# Altium PCB FU-AM-FU6861Q-B-002-HW-V3.0-20200620.PcbDoc (part 2 of 2)
Units mm, origin at the board's own origin, x right, y up, seen from the top; angles counter-clockwise.
Board outline 105.1 x 87.1 mm, 2 copper layers (TopLayer, BottomLayer); 151 components, 80 nets, 397 pads, 605 vias.
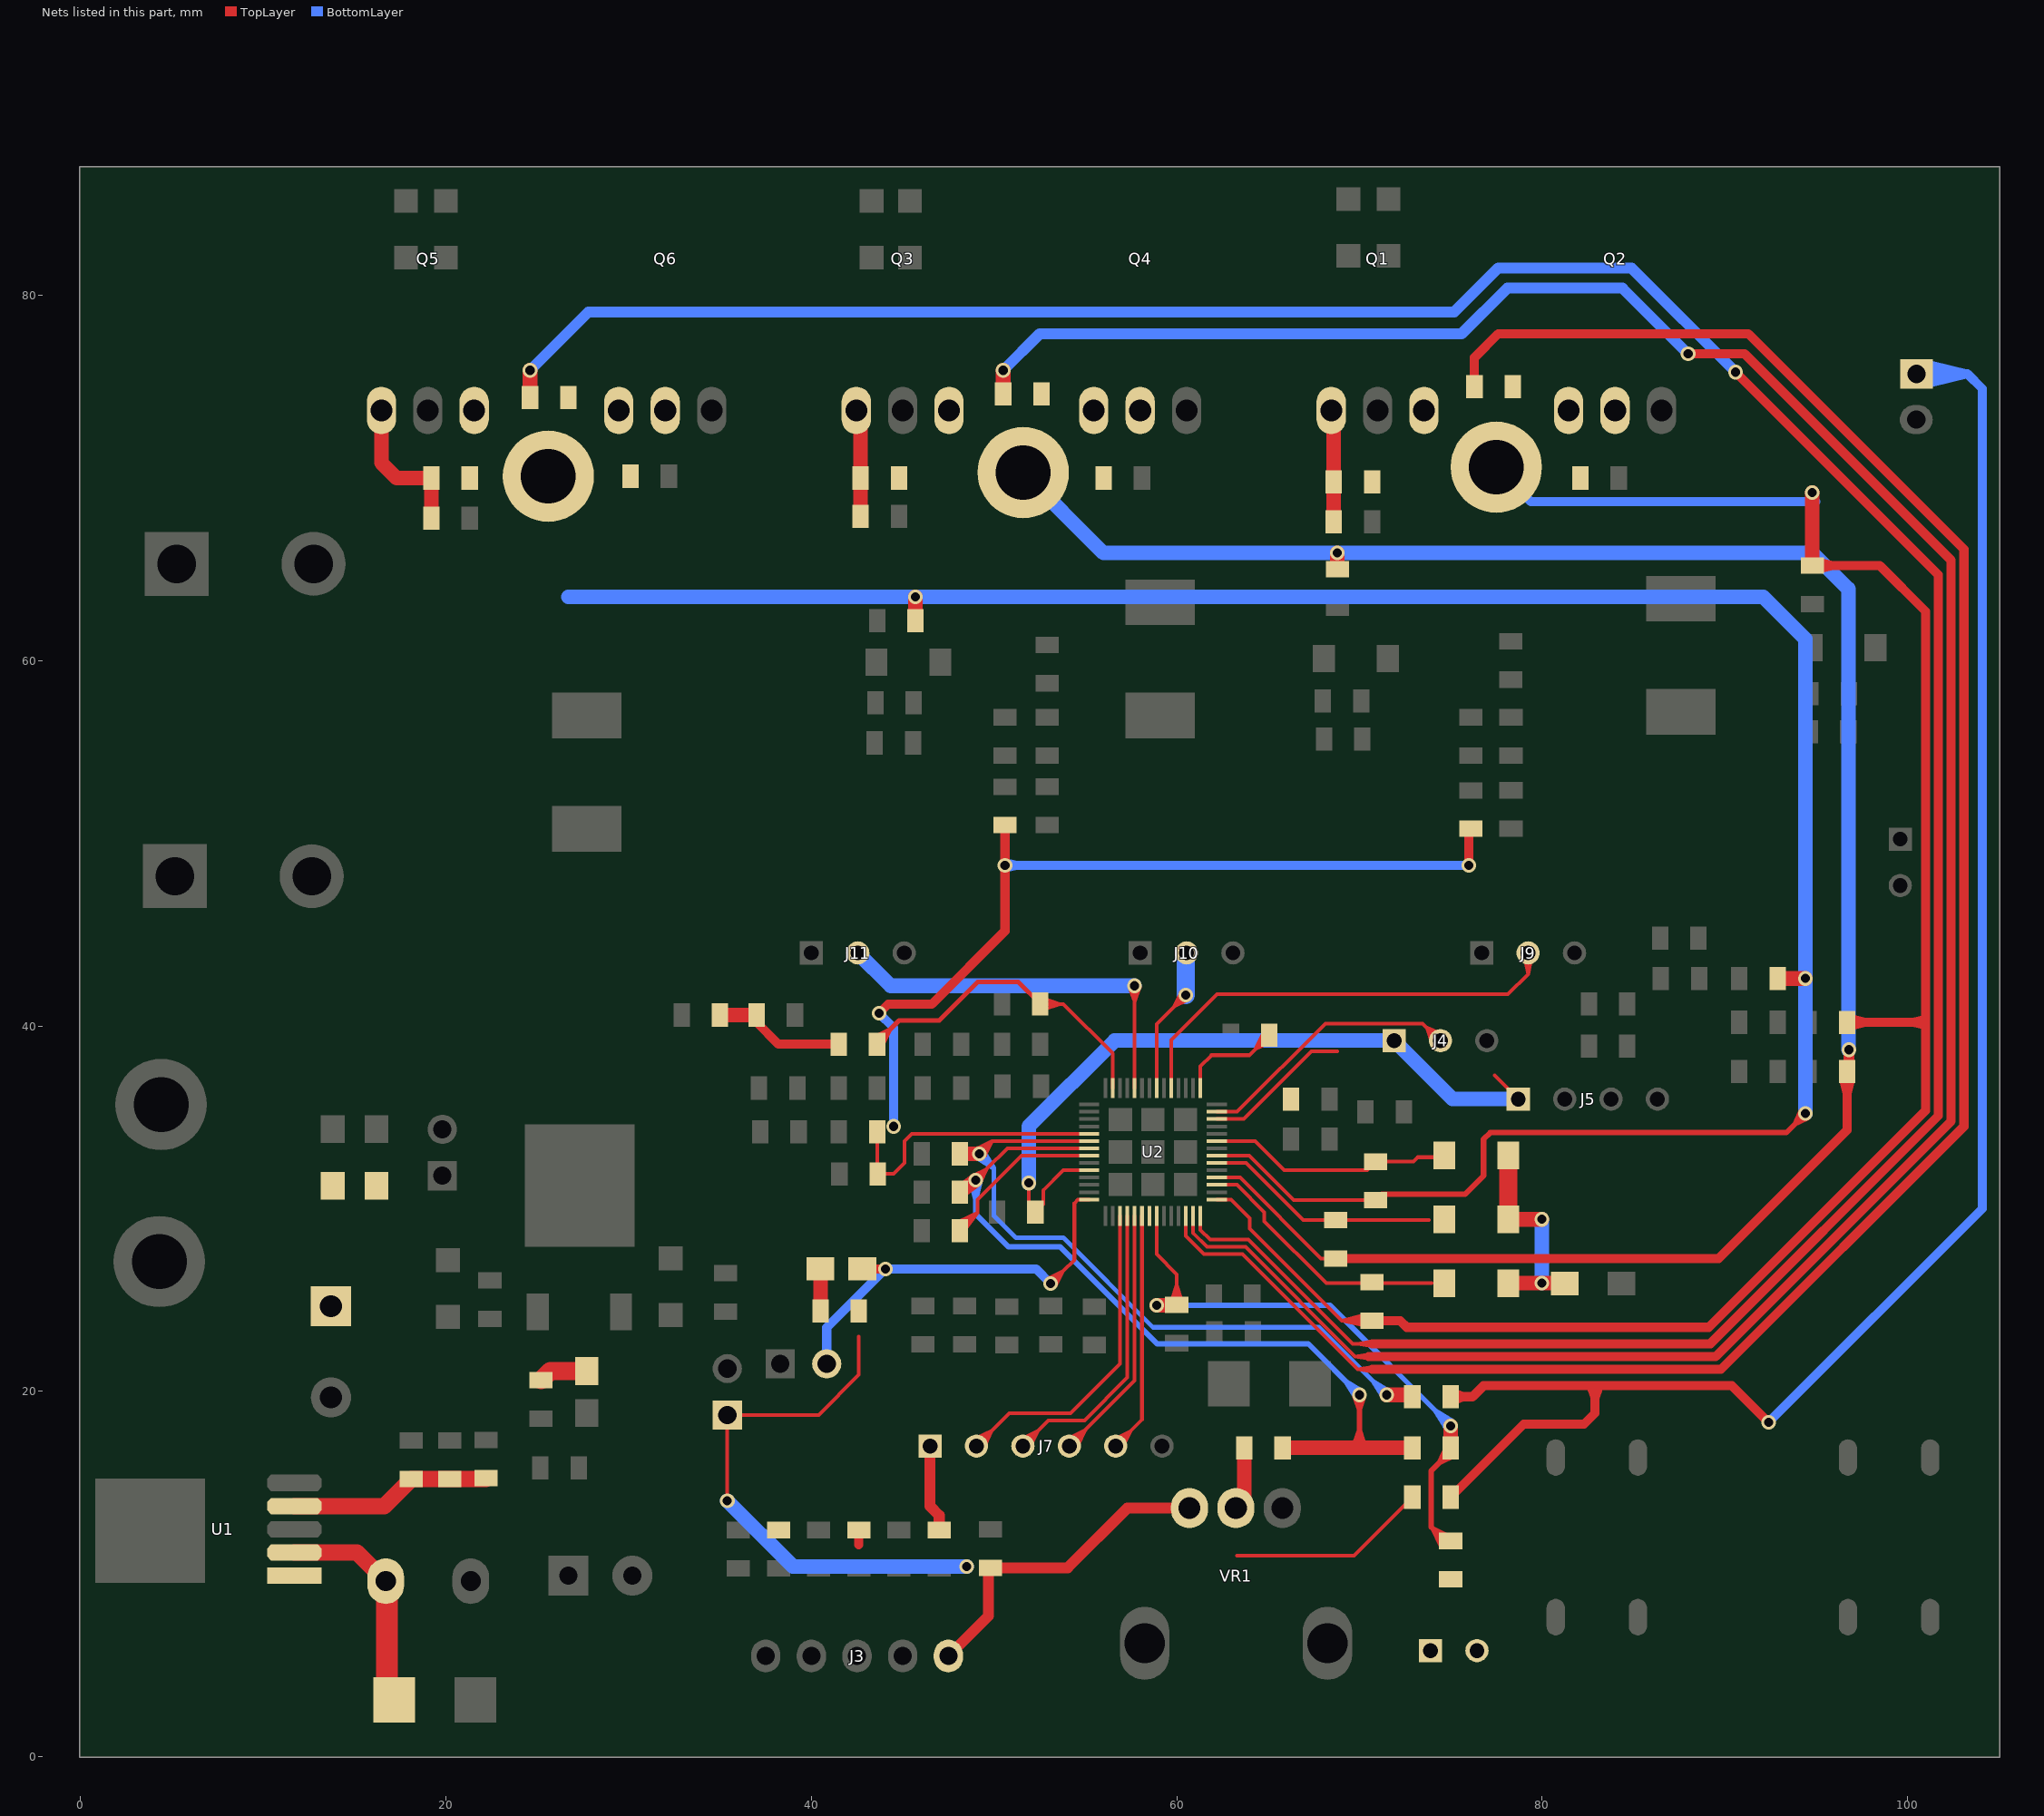
[diagram p2: the nets of this part, all layers, seen from the top]

## Via types
v1: diameter 0.8, hole 0.5, TopLayer to BottomLayer, tented both sides, 575 vias
v2: diameter 0.6, hole 0.3, TopLayer to BottomLayer, tented both sides, 30 vias

## Nets (pads, with @x,y where several pads share a name; then routed paths per layer and width w, separated by ;. In a path a pad name is that pad's centre, name@x,y a point inside that pad or via, vN(x,y) a via of type N, cw(c..) or ccw(c..) an arc to the next point about the centre after c; other vN are vias at no path point) (continued)
LOU: R25.1 U2.54 | length 119.2
  TopLayer w0.2: U2.54@60.5,29.6 60.5,28.5 61.5,27.5 63.6,27.5 69.9,21.2 ; 70.662,21.079 69.9,21.2 ; 70.687,21.333 69.9,21.2 ; 70.7,21.2 69.9,21.2
  TopLayer w0.5: 70.7,21.2 89.8,21.2 103.1,34.5 103.1,66.1 91.3,77.9 77.6,77.9 76.301,76.601 R25.1@76.301,74.999
LOV: R30.1 U2.55 | length 144.1
  TopLayer w0.2: U2.55@60.9,29.6 60.9,28.666 61.666,27.9 63.766,27.9 69.766,21.9 ; 70.5,21.9 69.766,21.9 ; 70.528,21.779 69.766,21.9 ; 70.553,22.033 69.766,21.9
  TopLayer w0.5: 70.5,21.9 89.51,21.9 102.4,34.79 102.4,65.5 91.1,76.8 v1(88,76.8)
  TopLayer w0.8: R30.1@50.501,74.599 v1@50.501,75.899
  BottomLayer w0.6: v1(50.5,75.9) 52.5,77.9 75.6,77.9 78.1,80.4 84.4,80.4 v1(88,76.8)
LOW: R31.1 U2.56 | length 168
  TopLayer w0.2: U2.56@61.3,29.6 61.3,28.831 61.831,28.3 63.931,28.3 69.631,22.6 70.7,22.6 ; 70.663,22.479 69.901,22.6 70.688,22.733
  TopLayer w0.5: 70.7,22.6 89.22,22.6 101.7,35.08 101.7,64.7 v1(90.6,75.8)
  TopLayer w0.8: R31.1@24.601,74.399 v1@24.601,75.899
  BottomLayer w0.6: v1(24.6,75.9) 27.8,79.1 75.2,79.1 77.6,81.5 84.9,81.5 v1(90.6,75.8)
MISO: J7.5 U2.48 | length 15
  TopLayer w0.2: J7.5@56.66,17 58.1,18.44 U2.48@58.1,29.6 ; J7.5@56.671,17.419 57.468,17.807 J7.5@57.079,17.011
MOSI: J7.3 U2.46 | length 17.9
  TopLayer w0.2: J7.3@51.58,17 52.98,18.4 54.954,18.4 57.3,20.746 U2.46@57.3,29.6 ; J7.3@51.607,17.434 52.403,17.823 ; J7.3@52.014,17.027 52.403,17.823
NetC4_1: C4.1 R1.2 R2.2 U1.1
NetC11_2: C11.2 R11.1 R12.2 U1.4 | length 11.1
  TopLayer w0.9: U1.4@11.7,13.71 16.611,13.71 R12.2@18.099,15.199 C11.2@22.165,15.199
NetC15_1: C15.1 U2.36 | length 13.6
  TopLayer w0.2: C15.1@47.903,29.111 48.7,29.5 ; C15.1@48.1,29.3 49.1,29.766 ; C15.1@48.134,28.734 48.151,28.795 C15.1@48.159,28.825 ; C15.1@48.134,28.8 C15.1@48.159,28.825 ; C15.1@48.183,28.912 C15.1@48.159,28.825 ; C15.1@48.3,28.7 49.1,29.766 ; C15.1@48.311,28.703 48.7,29.5 ; U2.36@55.2,32.9 51.5,32.9 49.1,30.5 49.1,29.766 ; C15.1@48.159,28.825 49.1,29.766
NetC43_2: C43.2 U2.15 | length 7.7
  TopLayer w0.2: U2.15@61.3,36.6 61.3,37.8 61.9,38.4 63.966,38.4 C43.2@65.066,39.5 ; C43.2@64.821,39.751 64.286,38.72 C43.2@65.082,39.109
NetD1_2: D1.2 L1.1 U1.2 | length 11.7
  TopLayer w0.9: U1.2@11.7,11.17 15.13,11.17 L1.1@16.7,9.6
  TopLayer w1.2: D1.2@16.764,3.455 L1.1@16.764,9.5
NetD6_A: D6.A D7.A D8.A R58.1 | length 11.9
  TopLayer w0.25: D8.A@78.16,33.013 D8.A@78.472,32.7
  TopLayer w0.8: D6.A@78.16,25.913 79.4,25.913 ; D7.A@78.672,29.413 v1(80,29.413) ; 79.587,25.913 79.4,25.913 ; R58.1@81.237,25.913 79.4,25.913
  TopLayer w1: D7.A@78.16,29.413 D8.A@78.16,32.813
  BottomLayer w0.8: v1(80,25.913) v1(80,29.413)
NetJ12_2: J12.2 LED1.2 U2.42 | length 24.8
  TopLayer w0.2: v1@52.971,26.179 53.767,26.567 54.4,27.2 54.4,30.303 54.597,30.5 U2.42@55.2,30.5 ; v1(53.1,25.9) 53.767,26.567 v1@53.378,25.771
  TopLayer w0.5: LED1.2@42.786,26.7 v1(44.056,26.7)
  BottomLayer w0.5: J12.2@40.84,21.5 40.84,23.484 v1(44.056,26.7) 52.3,26.7 v1(53.1,25.9)
NetLED1_1: LED1.1 R18.2 | length 2.3
  TopLayer w0.8: R18.2@40.498,24.401 R18.2@40.498,24.401 LED1.1@40.5,26.7
NetLED4_1: LED4.1 R10.2 | length 2.7
  TopLayer w1: R10.2@25.201,20.601 25.699,21.1 LED4.1@27.7,21.1
NetNTC1_1: NTC1.1 R9.2 R48.1 | length 102.9
  TopLayer w0.2: R48.1@75.361,19.412 76.199,19.7 76.197,19.701 R48.1@75.361,19.988 ; 82.612,20.039 82.9,19.201 83.188,20.039
  TopLayer w0.5: R48.1@74.998,19.701 76.197,19.701 76.201,19.701 76.8,20.3 82.9,20.3 ; R9.2@75.001,14.199 79.002,18.2 82.3,18.2 82.9,18.8 82.9,19.201 82.9,20.3 ; v1(92.4,18.3) 90.4,20.3 82.9,20.3
  BottomLayer w0.5: v1(92.4,18.3) 104.1,30 104.1,74.894 103.294,75.7 ; NTC1.1@100.5,75.7 103.294,75.7 ; NTC1.1@101.244,75.2 103.294,75.7 ; NTC1.1@101.244,76.2 103.294,75.7
NetQ1_1: Q1.1 R23.2 R24.2 | length 6
  TopLayer w0.8: R23.2@68.598,67.601 R24.2@68.598,69.801 Q1.1@68.598,73.562
NetQ2_1: Q2.1 R25.2 R26.2
NetQ3_1: Q3.1 R27.2 R29.2 | length 5.6
  TopLayer w0.8: R27.2@42.698,67.901 R29.2@42.698,70.001 Q3.1@42.698,73.462
NetQ4_1: Q4.1 R30.2 R32.2
NetQ5_1: Q5.1 R28.2 R49.2 | length 8.1
  TopLayer w0.8: Q5.1@16.46,73.7 16.46,70.84 17.299,70.001 R49.2@19.199,70.001 R28.2@19.199,67.801
NetQ6_1: Q6.1 R31.2 R50.2
NetR13_2: R13.2 R14.2 R15.1 | length 7.3
  TopLayer w0.2: R15.1@37.001,40.599 R15.1@37.202,40.399
  TopLayer w0.5: R15.1@37.001,40.199 38.199,39.001 R14.2@41.498,39.001
  TopLayer w0.8: R13.2@35.001,40.599 R15.1@37.001,40.599
NetR16_1: J13.1 J13.2 R16.1
NetR17_1: R17.1 VR1.W | length 3.3
  TopLayer w0.8: VR1.W@63.24,13.6 VR1.W@63.24,14.061 ; VR1.W@63.701,14.061 R17.1@63.701,16.899
NSS: J7.2 U2.45 | length 19.6
  TopLayer w0.2: J7.2@49.04,17 50.84,18.8 54.2,18.8 56.9,21.5 U2.45@56.9,29.6 ; J7.2@49.084,17.452 49.881,17.841 J7.2@49.492,17.044
ONOFF: U2.49
OVP: C13.1 R14.1 U2.27 | length 21.4
  TopLayer w0.2: R14.1@43.555,39.463 44.351,39.851 R14.1@43.962,39.055 ; C13.1@52.451,41.283 C13.1@52.534,41.2 53.8,41.2 56.5,38.5 U2.27@56.5,36.6 ; C13.1@52.762,40.912 53.6,41.2 C13.1@52.762,41.488
  TopLayer w0.25: R14.1@43.599,39.099 44.8,40.3 47,40.3 49.1,42.4 51.334,42.4 C13.1@52.534,41.2
P1.4: J9.2 U2.19 | length 28.4
  TopLayer w0.2: U2.19@59.7,36.6 59.7,39.231 62.204,41.735 78.135,41.735 79.24,42.84 ; J9.2@78.948,44.287 79.24,42.84 ; 79.24,43.34 J9.2@79.24,44 79.24,42.84 ; J9.2@79.532,44.287 79.24,42.84
P1.6: J10.2 U2.21 | length 9.8
  TopLayer w0.2: U2.21@58.9,36.6 58.9,40.1 59.85,41.05 ; v1@60.239,41.847 60.232,41.831 59.851,41.051 ; v1(60.5,41.7) 59.851,41.051 ; v1@60.647,41.439 60.631,41.431 59.85,41.05
  BottomLayer w1: v1(60.5,41.7) J10.2@60.5,43.96
P2.1: J11.2 U2.24 | length 23.5
  TopLayer w0.2: v1@57.412,42.139 57.423,42.105 57.7,41.301 ; U2.24@57.7,36.6 57.7,38.633 57.7,41.3 ; 57.7,41.5 57.7,41.301 ; v1(57.7,42.2) 57.7,41.301 ; v1@57.988,42.139 57.977,42.105 57.7,41.301
  BottomLayer w0.8: J11.2@42.54,44 44.34,42.2 v1(57.7,42.2)
PWMIN: C22.1 R16.2 R21.1 U2.50 | length 44.1
  TopLayer w0.2: U2.50@58.9,29.6 58.9,27.5 60,26.4 C22.1@60,24.734 ; C22.1@59.712,24.613 60,25.451 C22.1@60.288,24.612 ; C22.1@59.712,24.968 60,25.806 C22.1@60.288,24.968 ; R16.2@74.472,11.469 73.939,12.561 R16.2@74.736,12.172 ; R21.1@74.651,16.765 74.262,15.969 R21.1@75.058,16.358
  TopLayer w0.3: R16.2@74.699,11.801 73.939,12.561 73.939,15.646 R21.1@75,16.707
  TopLayer w0.8: v1(58.9,24.7) C22.1@59.966,24.7 ; R21.1@75,16.707 v1(75,18.1)
  BottomLayer w0.25: v1@59.005,24.445 60.096,24.7 v1@59.04,24.948 ; v1@74.689,18.061 74.117,18.983 v1@75.07,18.391
  BottomLayer w0.3: v1(58.9,24.7) 68.4,24.7 v1(75,18.1)
SCLK: J7.4 U2.47 | length 17.6
  TopLayer w0.2: J7.4@53.96,17.247 54.756,17.636 J7.4@54.367,16.839 ; J7.4@54.12,17 57.7,20.58 U2.47@57.7,29.6 ; J7.4@54.207,17.494 55.003,17.883 J7.4@54.614,17.087
SREF: C23.1 R17.2 R21.2 U2.35 | length 54.6
  TopLayer w0.2: v1@48.808,31.781 48.865,31.81 49.604,32.17 ; v1(48.989,31.555) 49.604,32.17 ; v1@49.215,31.374 49.243,31.431 49.604,32.17 ; 49.604,32.17 50.734,33.3 U2.35@55.2,33.3 ; 69.712,17.145 70,17.983 70.288,17.145 ; v1@69.712,19.711 69.715,19.702 70,18.873 70.285,19.702 v1@70.288,19.71
  TopLayer w0.3: 70,17.029 70,17.983 70,18.872 v1(70,19.8)
  TopLayer w0.8: C23.1@48.134,30.9 v1(48.989,31.555) ; R17.2@65.801,16.899 R21.2@72.897,16.899
  BottomLayer w0.25: v1@48.734,31.492 48.989,30.4 v1@49.237,31.456 ; v1@69.765,19.685 69.194,20.606 v1@70.146,20.015
  BottomLayer w0.3: v1(48.989,31.555) 48.989,30.4 48.989,29.7 50.789,27.9 53.628,27.9 58.928,22.6 67.2,22.6 v1(70,19.8)
TMOS: C44.1 R48.2 U2.34 | length 44
  TopLayer w0.2: v1@49.103,33.311 49.9,33.7 ; v1(49.2,33) 49.9,33.7 ; v1@49.511,32.903 49.9,33.7 ; U2.34@55.2,33.7 49.9,33.7
  TopLayer w0.8: C44.1@48.234,33 v1(49.2,33) ; v1(71.5,19.8) R48.2@72.799,19.8
  BottomLayer w0.25: v1@49.047,32.791 50,32.2 ; v1(49.2,33) 50,32.2 ; v1@49.428,33.122 50,32.2 ; v1@71.332,19.618 70.76,20.54 v1@71.713,19.948 ; v1(71.5,19.8) 67.8,23.5 58.7,23.5 53.8,28.4 51.2,28.4 50,29.6 50,32.2
U: C45.1 Q1.3 Q2.2 R24.1 R35.2 R46.2 U2.1 U5.1 | length 116.7
  TopLayer w0.2: U2.1@62.2,30.5 62.975,30.5 64,29.475 64,28.9 69.034,23.866 ; C45.1@70.18,24.155 69.034,23.866 ; C45.1@70.206,23.622 69.034,23.866 ; C45.1@70.206,23.745 69.444,23.866 C45.1@70.231,23.999 ; C45.1@70.7,23.866 69.034,23.866
  TopLayer w0.4: R35.2@95.3,65.001 96.1,65.201 R35.2@95.3,65.401 ; R46.2@97.092,39.999 97.892,40.199 R46.2@97.092,40.399 ; 100.927,39.999 100.127,40.199 100.927,40.399
  TopLayer w0.5: C45.1@70.7,23.866 72.234,23.866 72.6,23.5 89.13,23.5 101,35.37 101,62.7 98.499,65.201 R35.2@94.801,65.201 ; R46.2@96.701,40.199 100.7,40.199
  TopLayer w0.8: R35.2@94.801,65.201 v1(94.801,69.199)
  BottomLayer w0.5: U5.1@77.5,70.6 79.4,68.7 95,68.7
V: C48.1 Q3.3 Q4.2 R29.1 R36.2 R47.2 U2.4 V1.1 | length 119.1
  TopLayer w0.2: U2.4@62.2,31.7 63.472,31.7 67.906,27.266 C48.1@68.7,27.266
  TopLayer w0.4: R47.2@96.501,36.919 96.701,36.119 R47.2@96.901,36.919
  TopLayer w0.5: C48.1@68.7,27.266 89.667,27.266 96.701,34.3 R47.2@96.701,37.499
  TopLayer w0.6: R47.2@96.8,37.598 v1(96.8,38.7)
  TopLayer w0.8: R36.2@68.801,65.001 v1(68.8,65.9)
  BottomLayer w0.8: V1.1@51.6,70.3 56,65.9 v1(68.8,65.9) 94.806,65.9 96.774,63.932 v1@96.774,38.7
VBU: C45.2 D6.K U2.3 | length 14.3
  TopLayer w0.2: U2.3@62.2,31.3 63.306,31.3 64.8,29.806 64.8,29.3 68.187,25.913 73.96,25.913
VBV: C48.2 D7.K U2.6 | length 12.9
  TopLayer w0.2: U2.6@62.2,32.5 63.803,32.5 66.937,29.366 C48.2@68.7,29.366 73.806,29.366
VBW: C49.2 D8.K U2.9 | length 13.4
  TopLayer w0.2: U2.9@62.2,33.7 64.3,33.7 65.894,32.106 70.439,32.106 C49.2@70.899,32.566 72.952,32.566 73.199,32.813 D8.K@74.66,32.813
VCC_MODE: J4.2 U2.13 | length 16.3
  TopLayer w0.2: U2.13@62.2,35.3 63.3,35.3 68.135,40.135 73.465,40.135 74.4,39.2 J4.2@74.44,39.2 ; J4.2@73.988,39.062 73.7,39.9 J4.2@74.4,39.6
VDD5: C1.2 C34.2 C41.1 J3.1 J4.1 J5.1 J7.1 J8.1 R3.2 R4.2 R5.2 R9.1 R18.1 U2.12 U2.38 VR1.1 | length 112
  TopLayer w0.2: v1(35.4,14) J8.1@35.4,18.7 40.4,18.7 42.599,20.899 42.599,23.001 ; C34.2@51.9,30.2 v1(51.9,31.4) ; C34.2@52.7,30.234 52.7,31 53.8,32.1 U2.38@55.2,32.1 ; U2.12@62.2,34.9 63.675,34.9 67.375,38.6 68.8,38.6 ; 63.3,11 69.702,11 R9.1@72.901,14.199 ; 77.4,37.3 J5.1@78.7,36
  TopLayer w0.5: 42.601,11.601 R4.2@42.601,12.401
  TopLayer w0.6: J7.1@46.5,17 46.5,13.7 47.001,13.199 R5.2@47.001,12.401 ; J3.1@47.5,5.5 49.7,7.7 C1.2@49.7,10.234 ; C1.2@49.8,10.334 54.034,10.334 57.3,13.6 VR1.1@60.7,13.6
  BottomLayer w0.8: v1(35.4,14) 39,10.4 v1(48.5,10.4) ; v1(51.9,31.4) 51.9,34.5 56.6,39.2 J4.1@71.9,39.2 75.1,36 J5.1@78.7,36
VHALF: C28.1 R40.2 R44.2 R56.2 U2.33 | length 66.2
  TopLayer w0.2: C28.1@43.601,31.932 R56.2@43.601,34.199 ; C28.1@43.634,31.934 C28.1@43.634,31.9 44.5,31.9 45.1,32.5 45.1,33.7 45.5,34.1 U2.33@55.2,34.1
  TopLayer w0.5: v1(43.7,40.7) 44.2,41.2 46.6,41.2 50.6,45.2 v1(50.6,48.8) R44.2@50.6,50.998 ; v1(76,48.8) R40.2@76,50.699
  BottomLayer w0.25: v1@50.699,48.545 51.791,48.8 v1@50.735,49.048
  BottomLayer w0.5: v1(43.7,40.7) 44.5,39.9 v1(44.5,34.5) ; v1@50.5,48.8 v1(50.6,48.8) v1(76,48.8)
W: C49.1 Q5.3 Q6.2 R37.2 R49.1 R52.2 U2.7 W1.1 | length 135.6
  TopLayer w0.2: U2.7@62.2,32.9 63.969,32.9 66.403,30.466 C49.1@70.899,30.466 C49.1@71.234,30.8 ; 93.761,34.549 v1@94.557,34.938 ; 93.761,34.549 v1@94.15,35.346
  TopLayer w0.3: C49.1@71.234,30.8 75.8,30.8 76.8,31.8 76.8,33.8 77.163,34.163 93.375,34.163 v1(94.412,35.2)
  TopLayer w0.8: R37.2@45.701,62.199 v1(45.701,63.5) ; R52.2@92.902,42.6 v1(94.412,42.6)
  BottomLayer w0.8: 26.7,63.5 v1(45.701,63.5) 92.1,63.5 94.412,61.189 v1(94.412,42.6) v1(94.412,35.2)
pads on no net: Q1.0 Q2.0 Q3.0 Q4.0 Q5.0 Q6.0 U2.53 VR1.4 VR1.5

## Polygon pours and split planes (outlines as drawn)
GND on TopLayer "Bottom Layer-No Net" (hatched 90Degree grid 0.2 track 0.2, remove dead copper, pour order 1110): 81.4,17.6 79.5,17.6 77.6,15.7 77.6,7.2 79.9,4.9 97.5,4.9 99.8,7.2 99.8,27.4 99.4,27.8 96.2,27.8 89.8,21.4 85.5,21.4 82.3,18.2
GND on TopLayer "Bottom Layer-No Net" (hatched 90Degree grid 0.2 track 0.2, remove dead copper, pour order 1111): 34.5,1.8 94.4,1.8 98.797,6.197 93.794,11.2 79.275,11.2 77.175,9.1 34.5,9.1
NetR16_1 on TopLayer "Bottom Layer-No Net 1" (hatched 90Degree grid 0.2 track 0.2, remove dead copper, pour order 1113): 73.2,5.3 73.2,9.4 73.9,10.1 76.5,10.1 77.197,9.403 77.2,5.5 76.7,5 73.5,5
GND on TopLayer "Top Layer-No Net" (hatched 90Degree grid 0.2 track 0.2, remove dead copper, pour order 1075): 96.2,61.4 101,61.4 101,44 90.897,44 90.797,44.1 90.797,45.794 95.4,50.397 96.197,51.194 96.197,61.397
GND on TopLayer "Top Layer-No Net" (hatched 90Degree grid 0.2 track 0.2, remove dead copper, pour order 1073): 47.6,60.6 47.6,59.1 46.4,57.9 46.2,57.7 46.2,55.1 46.2,45.6 46.1,45.5 43.8,45.5 43.8,53.8 44.8,54.8 45,55 45,56.1 45,59.8 45.8,60.6 47.6,60.6
GND on TopLayer "Top Layer-No Net" (hatched 90Degree grid 0.2 track 0.2, remove dead copper, pour order 1071): 71,60.8 71,59.7 69.7,58.4 69.7,49 69.7,45 71.7,45 72.4,45.7 72.4,60.8 71,60.8
GND on TopLayer "Top Layer-No Net" (hatched 90Degree grid 0.2 track 0.2, remove dead copper, pour order 1069): 98.9,61.4 98.9,59.1 98.3,58.5 97.6,57.8 97.6,56.8 97.6,51.1 96.7,50.2 92.8,46.3 92.8,45.3 92.8,44.3 92.6,44.1 92.2,44.1 90.1,44.1 89.9,44.3 89.9,45.4 89.9,46.4 89.8,46.5 89.5,46.8 88.9,46.8 81,46.8 81,49.1 81,49.2 82,50.2 82.3,50.5 86.7,50.5 93,50.5 95.1,52.6 95.9,53.4 95.9,60.6 95.9,61.1 96.1,61.3 96.2,61.4 98.9,61.4
I_SHUNT on TopLayer "Top Layer-No Net" (hatched 90Degree grid 0.2 track 0.2, remove dead copper, pour order 1067): 40.6,61.997 40.6,56.4 40.6,55.5 39.2,54.1 37.9,52.8 35,52.8 30.1,52.8 29.9,53 29.9,55.4 29.897,55.4 28.5,56.797 29.997,58.294 29.997,61.2 30.697,61.9 40.6,61.9
VDD5 on TopLayer "Top Layer-No Net" (hatched 90Degree grid 0.2 track 0.2, remove dead copper, pour order 1064): 42.1,21.797 42.1,23.9 42.1,24.9 42.2,25 42.3,25.1 43.4,25.1 43.9,25.1 44.8,26 45.9,27.1 46.7,27.1 46.7,26.7 43.2,23.2 43.2,21 42.897,21 42.1,21.797
GND on TopLayer "Bottom Layer-No Net" (hatched 90Degree grid 0.2 track 0.5, remove dead copper, pour order 1066): 27.7,52.4 27.2,51.9 25,51.9 25,44.2 26.603,42.597 36.797,42.597 38.3,44.1 38.3,49.2 37.6,49.9 31.5,49.9 29.5,51.9 28.2,51.9 27.7,52.4
GND on TopLayer "Bottom Layer-No Net" (hatched 90Degree grid 0.2 track 0.2, remove dead copper, pour order 1114): 92.3,33.9 80,33.9 79.6,33.5 79.6,29.8 81,28.4 88.9,28.4 92.4,31.9
GND on TopLayer "Bottom Layer-No Net" (hatched 90Degree grid 0.2 track 0.2, remove dead copper, pour order 1112): 75,86.3 9.7,86.3 9.1,85.7 9.1,84.9 9.5,84.5 75.3,84.5 75.5,84.7 75.5,86.2 75.4,86.3
GND on TopLayer "Bottom Layer-No Net" (hatched 90Degree grid 0.2 track 0.2, remove dead copper, pour order 1109): 60.7,23.1 58.2,23.1 58.1,23 58.1,17 57.4,16.3 49.9,16.3 49.2,15.6 49.2,12 54.4,12 57.4,15 59.7,15 60.7,16 60.7,22.9
GND on TopLayer "Bottom Layer-No Net" (hatched 90Degree grid 0.2 track 0.2, remove dead copper, pour order 1108): 32.5,19.5 27.1,19.5 26.9,19.3 26.9,14.9 26.9,13.8 28.6,12.1 28.6,7.4 28,6.8 21.8,6.8 20.8,5.8 20.6,5.6 20.6,1.8 37.6,1.8 38.4,2.6 38.4,7.9 37.4,8.9 35.4,8.9 34.4,9.9 33.8,10.5 33.8,16.8 33.8,18.9 33.2,19.5
GND on TopLayer "Bottom Layer-No Net" (hatched 90Degree grid 0.2 track 0.2, remove dead copper, pour order 1107): 6.3,21.5 1.6,21.5 0.9,20.8 0.9,7.5 1.5,6.9 6,6.9 6.9,7.8 6.9,20.9 6.3,21.5
GND on TopLayer "Bottom Layer-No Net" (hatched 90Degree grid 0.2 track 0.2, remove dead copper, pour order 1106): 50.8,41.9 49.3,41.9 49.2,41.8 49.1,41.7 49.1,36.2 49.4,35.9 50.8,35.9
GND on TopLayer "Bottom Layer-No Net" (hatched 90Degree grid 0.2 track 0.2, remove dead copper, pour order 1105): 34.5,42.797 34.897,42.4 37,42.4 37.8,42.4 38.7,41.5 38.7,40 39.5,40 39.5,43.5 38.3,44.7
GND on TopLayer "Bottom Layer-No Net" (hatched 90Degree grid 0.2 track 0.2, remove dead copper, pour order 1104): 60.9,35.8 60.9,35.6 60.7,35.4 60.1,35.4 56.3,35.4 56.3,32.7 56.1,32.5 56.4,32.2 56.4,30.7 61,30.7 61,34.2 61.3,34.5 61.1,34.7 61.1,35.4 60.9,35.6
GND on TopLayer "Bottom Layer-No Net" (hatched 90Degree grid 0.2 track 0.2, remove dead copper, pour order 1103): 61.1,26.9 61.4,26.6 61.9,26.6 62.8,26.6 63.2,26.2 63.5,25.9 63.5,22.5 65.4,22.5 65.8,22.1 66.2,21.7 66.2,19.1 66.2,18.4 66.5,18.1 69.1,18.1 69.3,18.3 69.3,18.8 68.9,19.2 68.9,21.2 68.1,22 66.3,23.8 65.1,23.8 64.6,24.3 64.6,25.8 63.5,26.9 62.4,26.9
+12V on TopLayer "Bottom Layer-No Net" (hatched 90Degree grid 0.2 track 0.2, remove dead copper, pour order 1102): 60.734,26.4 61.234,25.9 62.5,25.9 62.5,22.2 62.8,21.9 63,21.7 64,21.7 64,19 63.9,18.9 60.1,18.9 59.9,19.1 59.9,19.8 60.1,20 61.634,21.534 61.634,22.8 61.634,25.5 60.771,26.362
VHALF on TopLayer "Bottom Layer-No Net" (hatched 90Degree grid 0.2 track 0.2, remove dead copper, pour order 1101): 44.6,34.8 43.1,34.8 43.1,31.4 43.2,31.3 44.6,31.3 44.9,31.6 45.1,31.8 45.1,32.7 45.1,32.5 44.795,32.195 44.405,32.195 44.1,32.5 44.1,33.4 44.9,34.2 44.9,34.7 44.8,34.8
VDD5 on TopLayer "Bottom Layer-No Net" (hatched 90Degree grid 0.2 track 0.2, remove dead copper, pour order 1100): 73.2,14.8 72.5,14.8 69.1,11.4 65.5,11.4 62.3,11.4 61.7,12 61.6,12.1 61.6,14 61.6,14.5 61.4,14.7 57.8,14.7 54,10.9 49.1,10.9 48.3,11.7 47.6,12.4 47.6,13.1 47.1,13.6 47.1,17.6 45.9,17.6 45.9,11.7 45.7,11.5 43.5,11.5 43.3,11.7 43.2,11.8 43.2,12.8 42,12.8 42,11.9 41.7,11.6 41.6,11.5 40.7,11.5 39.4,11.5 39,11.9 38.8,12.1 38.8,12.8 37.6,12.8 37.6,11.9 38,11.5 38.2,11.3 39.4,11.3 47.9,11.3 48.1,11.1 48.2,11 48.2,10.1 48.2,7.5 46.8,6.1 46.8,4.9 47,4.7 48.1,4.7 48.2,4.8 50,6.6 50,8 50,9.2 50.6,9.8 54.8,9.8 56.7,11.7 60.6,11.7 61.9,10.4 70.1,10.4 73.2,13.5
VDD5 on TopLayer "Bottom Layer-No Net" (hatched 90Degree grid 0.2 track 0.2, remove dead copper, pour order 1099): 52,31.7 51.7,31.7 51.6,31.6 51.3,31.3 51.3,30.2 51.3,28.3 50.4,27.4 50.1,27.1 49.1,27.1 46.4,27.1 44,24.7 43,23.7 42.1,23.7 42.1,21.2 40.9,20 40.4,19.5 34.6,19.5 34.6,13.9 34.9,13.6 35.8,13.6 36.2,14 36.2,17.6 36.8,18.2 40.4,18.2 42.9,20.7 43.2,21 43.2,23.1 43.2,23.4 45.5,25.7 46.5,26.7 50.2,26.7 51,26.7 52.1,27.8 52.7,28.4 52.7,30.8 52.7,31 52.6,30.9 52.6,30.6 52.5,30.5 52.3,30.5 52.2,30.5 52.1,30.6 52.1,31.1 52.3,31.3 52.3,31.6 52.2,31.7
+12V on TopLayer "Bottom Layer-No Net" (hatched 90Degree grid 0.2 track 0.2, remove dead copper, pour order 1098): 20.549,32.461 18.593,32.461 18.161,32.029 17.704,31.572 17.704,27.203 17.704,25.222 19.355,23.571 19.634,23.292 19.634,16.866 22.758,16.866 23.114,17.221 23.647,17.755 24.46,17.755 24.79,17.424 24.79,16.078 24.79,13.208 25.806,12.192 25.806,11.481 25.476,11.151 20.879,11.151 20.422,10.693 20.422,8.636 20.726,8.331 27.432,8.331 27.788,8.687 27.788,11.735 27.076,12.446 25.857,13.665 25.857,18.948 23.089,18.948 22.2,18.059 22.123,17.983 21.158,17.983 20.803,18.339 20.803,20.549 20.803,22.936 21.234,23.368 21.26,23.393 25.578,23.393 25.578,25.248 25.552,25.273 24.511,25.273 24.003,24.765 19.71,24.765 18.72,25.756 18.72,28.092 20.396,29.769 20.879,30.251 20.879,32.461
GND on TopLayer "Bottom Layer-No Net" (hatched 90Degree grid 0.2 track 0.2, remove dead copper, pour order 1097): 14.986,15.596 16.307,16.916 18.593,16.916 18.593,20.93 18.339,21.184 13.081,21.184 12.497,20.599 12.497,18.948 12.954,18.491 14.173,18.491 14.884,17.78 14.986,17.678 14.986,15.9
NetC4_1 on TopLayer "Bottom Layer-No Net" (hatched 90Degree grid 0.2 track 0.2, remove dead copper, pour order 1096): 16.7,32 13.1,32 12.9,31.8 12.5,31.4 12.5,24.8 8.1,20.4 8.1,12.4 8.1,10.6 8.9,9.8 9.15,9.55 13.208,9.55 13.208,10.262 9.957,10.262 9.296,10.922 8.915,11.303 8.915,16.078 8.915,19.025 12.954,23.063 13.462,23.571 14.808,23.571 14.808,29.896 15.037,30.124 15.519,30.607 16.84,30.607 16.84,32.004
VDD5 on TopLayer "Bottom Layer-No Net" (hatched 90Degree grid 0.2 track 0.2, remove dead copper, pour order 1095): 63.675,34.9 64.208,35.433 66.624,35.433 66.624,36.601 67.158,37.135 67.361,37.338 70.231,37.338 74.6,37.338 76.175,35.763 76.581,35.357 79.273,35.357 79.273,36.601 78.765,37.109 78.41,37.465 73.609,37.465 70.307,37.465 69.926,37.846 69.444,38.329 69.444,39.141 67.917,39.141 66.302,37.527 63.853,35.077 63.83,35.077
GND on TopLayer "Bottom Layer-No Net" (hatched 90Degree grid 0.2 track 0.2, remove dead copper, pour order 1094): 64.3,34.5 64.472,34.5 64.82,34.849 66.548,34.849 67.31,34.849 67.488,34.671 67.894,34.265 67.894,33.249 68.758,33.249 68.783,33.274 68.783,35.763 69.012,35.992 69.418,36.398 69.825,36.398 71.196,36.398 71.603,35.992 72.009,35.585 72.009,34.646 74.371,34.646 74.625,34.9 74.625,36.195 74.219,36.601 74.066,36.754 69.672,36.754 68.148,36.754 67.945,36.551 67.945,35.611 67.488,35.154 67.259,34.925 66.243,34.925 64.725,34.925 64.456,34.656
VBW on TopLayer "Bottom Layer-No Net" (hatched 90Degree grid 0.2 track 0.2, remove dead copper, pour order 1093): 70.104,32.106 75.108,32.106 75.209,32.207 75.209,33.655 72.212,33.655 71.653,33.096 71.476,32.918 70.307,32.918 69.52,32.131 69.52,32.106
+12V on TopLayer "Bottom Layer-No Net" (hatched 90Degree grid 0.2 track 0.2, remove dead copper, pour order 1092): 64.643,34.1 66.143,32.6 67.767,32.6 69.303,32.6 70.079,33.376 70.155,33.452 70.688,33.452 70.815,33.452 71.069,33.706 71.069,35.56 70.79,35.839 69.621,35.839 69.494,35.712 69.494,33.198 69.139,32.842 68.986,32.69 68.174,32.69 67.259,32.69 66.827,33.122 66.726,33.223 66.726,34.315 65.216,34.315 65,34.1
GND on TopLayer "Bottom Layer-No Net" (hatched 90Degree grid 0.2 track 0.2, remove dead copper, pour order 1091): 91.237,36.906 87.96,36.906 87.274,37.592 86.614,38.252 84.252,38.252 84.252,39.421 84.226,39.446 85.877,39.446 86.69,38.633 87.249,38.075 91.237,38.075
GND on TopLayer "Bottom Layer-No Net" (hatched 90Degree grid 0.2 track 0.2, remove dead copper, pour order 1090): 90.932,39.573 87.376,39.573 86.766,40.183 86.309,40.64 84.176,40.64 84.176,41.783 85.598,41.783 86.284,41.097 86.868,40.513 89.56,40.513 90.043,40.513 90.297,40.767 90.449,40.919 91.237,40.919 91.237,39.573
VBU on TopLayer "Bottom Layer-No Net" (hatched 90Degree grid 0.2 track 0.2, remove dead copper, pour order 1089): 68.187,25.913 68.446,25.654 70.841,25.654 73.279,25.654 73.609,25.324 73.736,25.197 75.184,25.197 75.184,26.543 70.155,26.543 69.825,26.213 69.524,25.913 68.885,25.913
V on TopLayer "Bottom Layer-No Net" (hatched 90Degree grid 0.2 track 0.2, remove dead copper, pour order 1088): 65.346,29.825 65.346,29.319 67.742,26.924 67.843,26.822 69.266,26.822 69.533,26.822 69.977,27.266 69.608,27.635 68.529,27.635 67.536,27.635 66.842,28.329
VBV on TopLayer "Bottom Layer-No Net" (hatched 90Degree grid 0.2 track 0.2, remove dead copper, pour order 1087): 66.937,29.366 67.296,29.007 69.139,29.007 73.635,29.007 73.838,28.804 73.914,28.727 75.235,28.727 75.235,30.074 72.818,30.074 72.111,29.366 69.745,29.366 69.393,29.718 66.585,29.718 66.213,30.09
W on TopLayer "Bottom Layer-No Net" (hatched 90Degree grid 0.2 track 0.2, remove dead copper, pour order 1086): 71.958,30.8 71.897,30.861 70.637,30.861 66.008,30.861 65.841,31.028 66.403,30.466 69.113,30.466 69.813,30.466 70.18,30.099 71.791,30.099 72.492,30.8
NetQ2_1 on TopLayer "Bottom Layer-No Net" (hatched 90Degree grid 0.2 track 0.2, remove dead copper, pour order 1085): 78,75.6 78,74.4 78.7,74.4 80,73.1 80.9,72.2 80.9,70.3 80.9,69.6 81,69.5 81.1,69.4 82.5,69.4 82.5,71.1 82.2,71.4 82.2,75.4 82,75.6
U on TopLayer "Bottom Layer-No Net" (hatched 90Degree grid 0.2 track 0.2, remove dead copper, pour order 1084): 73.8,74.9 73.1,74.9 72.9,74.7 72.8,74.6 72.8,73.5 72.8,71.1 72.4,70.7 72.1,70.4 70.3,70.4 70.3,69.2 72.5,69.2 73.1,68.6 75,66.7 77.5,66.7 79.5,66.7 80,67.2 80,71.8 79.2,72.6 78.6,73.2 77.4,73.2 75,73.2 74.8,73.4 74.8,74.6 74.5,74.9
NetQ4_1 on TopLayer "Bottom Layer-No Net" (hatched 90Degree grid 0.2 track 0.2, remove dead copper, pour order 1083): 56.4,69.4 55.4,69.4 55.4,72 54.3,73.1 53.4,74 52.2,74 52.2,75.3 55.5,75.3 56.3,74.5 56.4,74.4 56.4,69.4
V on TopLayer "Bottom Layer-No Net" (hatched 90Degree grid 0.2 track 0.2, remove dead copper, pour order 1082): 48,75 47,75 46.8,74.8 46.8,71.8 46,71 45.8,70.8 44.4,70.8 44.4,69.4 44.5,69.3 45.9,69.3 46.9,68.3 48.3,66.9 51.2,66.9 53.5,66.9 54.3,67.7 54.3,71.4 53.2,72.5 52.8,72.9 51.9,72.9 49.3,72.9 49,73.2 49,74.8 48.8,75
W on TopLayer "Bottom Layer-No Net" (hatched 90Degree grid 0.2 track 0.2, remove dead copper, pour order 1081): 22.6,75.1 21.3,75.1 20.8,74.6 20.8,69.4 20.9,69.3 22.1,69.3 23.1,68.3 24.6,66.8 25.4,66.8 27.7,66.8 28.2,67.3 28.2,71.5 27.3,72.4 26.9,72.8 24.2,72.8 23.6,72.8 23.1,73.3 23.1,75 23,75.1
NetQ6_1 on TopLayer "Bottom Layer-No Net" (hatched 90Degree grid 0.2 track 0.2, remove dead copper, pour order 1080): 26.3,75 26.3,73.7 27.6,73.7 28.8,72.5 29.1,72.2 29.1,69.6 29.3,69.4 30.5,69.4 30.5,74.4 29.9,75
IV+ on TopLayer "Bottom Layer-No Net" (hatched 90Degree grid 0.2 track 0.5, remove dead copper, pour order 1079): 65.9,75 60.4,75 60,74.6 60,72.8 57.8,70.6 57.8,69.3 56.3,67.8 54.6,66.1 54.6,62.4 54.9,62.1 65.8,62.1 66.5,62.8 66.6,62.9 66.6,72 66.6,74.6 66.2,75
IU+ on TopLayer "Bottom Layer-No Net" (hatched 90Degree grid 0.2 track 0.5, remove dead copper, pour order 1077): 86.2,74.9 85.9,74.6 85.9,72.6 83.9,70.6 83.9,62.6 84.3,62.2 92.9,62.2 93.4,62.7 93.4,71.3 89.8,74.9
I_SHUNT on TopLayer "Bottom Layer-No Net" (hatched 90Degree grid 0.2 track 0.5, remove dead copper, pour order 1074): 40.4,74.9 34.1,74.9 33.9,74.7 33.9,72.7 31.8,70.6 31.8,68.9 22.5,59.6 22.5,56.1 22.7,55.9 29.5,55.9 31.2,57.6 39,57.6 40.6,59.2 40.6,74.7
+80V on TopLayer "Bottom Layer-No Net" (hatched 90Degree grid 0.2 track 0.25, remove dead copper, pour order 1063): 1.5,33.1 1,33.6 1,75.4 9,83.4 73.7,83.4 74.2,82.9 74.2,77.4 71.9,75.1 71.9,72.5 71.8,72.4 70.4,72.4 70.1,72.7 70.1,74.9 67.9,77.1 47.5,77.1 45.9,75.5 45.9,72.5 45.8,72.4 44.2,72.4 44,72.6 44,75.4 42.3,77.1 21.7,77.1 19.9,75.3 19.9,72.5 19.7,72.3 18.3,72.3 18,72.6 18,75.1 17.2,75.9 15.7,75.9 7.4,67.6 7.4,47.9 10.4,44.9 10.4,38.9 13.9,35.4 20.4,35.4 20.9,34.9 20.9,33.8 20.5,33.4 13.3,33.4 8.6,38.1 8.6,44.2 6.9,45.9 6.3,45.9 5.9,45.5 5.9,38 6.9,37 6.9,33.3 6.7,33.1
I_SHUNT on TopLayer "Top Layer-No Net" (hatched 90Degree grid 0.2 track 0.2, remove dead copper, pour order 1062): 54.7,58.3 54.2,58.1 54.2,52.5 54.6,52.1 64.2,52.1 64.7,52.6 64.7,59 64.2,59.5 60.7,59.5 60.2,58.3
I_SHUNT on TopLayer "Top Layer-No Net" (hatched 90Degree grid 0.2 track 0.2, remove dead copper, pour order 1065): 87.8,58.7 84.2,58.7 80.6,58.7 80.3,58.4 80.2,58.3 80.2,52.1 80.7,51.6 82.2,51.6 91.5,51.6 91.9,52 92.2,52.3 92.2,52.9 92.2,59 92,59.2 91.9,59.3 90.2,59.3 90,59.3 89.6,58.9 89.4,58.7 87.8,58.7
VDD5 on TopLayer "Top Layer-No Net" (hatched 90Degree grid 0.2 track 0.2, remove dead copper, pour order 1068): 67.197,38.422 68.91,40.135 71.9,40.135 72.565,40.135 72.8,39.9 72.8,39.2 72.8,38.5 73.1,38.2 73.3,38 74.5,38 77.875,38 79.078,36.797 79.273,36.601 79.273,35.357 77.04,35.357 77,35.397 75.397,37 74.3,37 66.697,37 66.397,36.7 67.202,37.505 67.202,38.427
GND on TopLayer "Top Layer-No Net" (hatched 90Degree grid 0.2 track 0.2, remove dead copper, pour order 1070): 21.9,36.7 21.9,30.2 20.1,28.4 19.6,27.9 19.6,26.4 19.6,26.2 20.1,25.7 20.3,25.5 22.8,25.5 37.9,25.5 39.4,27 40,27.6 40.9,27.6 47.214,27.6 47.224,27.61 47.1,27.734 47.1,30.4 47.1,33.4 46.9,33.6 46,33.6 36.8,33.6 36.4,34 36.4,35.4 36.4,35.9 36.3,36 36.1,36.2 33.5,36.2 29.4,36.2 28.9,36.7 21.9,36.7
GND on BottomLayer "Top Layer-No Net" (hatched 90Degree grid 0.2 track 0.2, remove dead copper, pour order 1072): 41.2,50.3 39.3,48.4 39.3,46.2 99.1,46.2 99.6,46.7 99.7,73.9 105.1,73.9 105.1,8.8 103.4,7.1 100.2,7.1 87.3,-5.8 22.7,-5.8 22.7,45.803 27.197,50.3
NetR16_1 on BottomLayer "Bottom Layer-No Net 1" (hatched 90Degree grid 0.1 track 0.1, remove dead copper, pour order 1116): 73.2,5.3 73.2,6.3 73.4,6.5 76.7,6.5 77.1,6.1 77.1,5.5 76.7,5.1 73.4,5.1
GND on BottomLayer "Top Layer-No Net" (hatched 90Degree grid 0.2 track 0.2, remove dead copper, pour order 1078): 103.5,73.9 98.9,73.9 98.035,73.035 98.035,54.6 98.035,43.25 98.685,42.6 98.882,42.797 102.5,42.797 102.5,72.797 103.5,73.797
GND on BottomLayer "Top Layer-No Net" (hatched 90Degree grid 0.2 track 0.2, remove dead copper, pour order 1076): 30.197,50.5 93.018,50.5 93.218,50.3 93.218,48.4 93.218,38.315 91.7,36.797 72.203,17.3 28.997,17.3 28.997,49.194 30.2,50.397
GND on BottomLayer "Bottom Layer-No Net" (hatched 90Degree grid 0.2 track 0.2, remove dead copper, pour order 1127): 22.7,1.197 11.503,1.197 7.5,5.2 5.8,6.9 2.5,6.9 1.5,6.9 0.997,7.403 0.997,20.997 2.1,22.1 10.899,22.1 16.596,27.797 18.499,29.7 23.597,29.7
GND on BottomLayer "Bottom Layer-No Net" (hatched 90Degree grid 0.2 track 0.2, remove dead copper, pour order 1126): 17.52,32.12 20.4,35 23.503,35 31.1,42.597 25.1,42.597 22.397,45.3 19.197,45.3 13.597,39.7
W on BottomLayer "Bottom Layer-No Net" (hatched 90Degree grid 0.2 track 0.8, remove dead copper, pour order 1125): 28.1,63.5 26.3,63.5 21,68.8 21,74.5 21.3,74.8 22.9,74.8 23.6,74.1 25.6,74.1 28.4,71.3 30.4,71.3 31.1,72 31.4,72.3 31.4,74.2 31.4,74.6 31.6,74.8 32.5,74.8 32.6,74.7 32.6,71.9 41,63.5
V on BottomLayer "Bottom Layer-No Net" (hatched 90Degree grid 0.2 track 0.8, remove dead copper, pour order 1124): 58.6,71.4 58.6,76.3 58.3,76.6 53.2,76.6 50.1,73.5 51.997,73.5 53.228,72.269 53.228,75.028 54.3,76.1 56.6,76.1 57.4,75.3 57.4,73.397 57.6,73.197
V on BottomLayer "Bottom Layer-No Net" (hatched 90Degree grid 0.2 track 0.8, remove dead copper, pour order 1123): 47.6,65.9 46.9,66.6 46.9,74.4 47.3,74.8 48.8,74.8 49.2,74.4 51.4,74.4 54.4,71.4 56.4,71.4 57.4,72.4 57.4,74.6 57.5,74.7 58.4,74.7 58.6,74.5 58.6,70.4 63.1,65.9
U on BottomLayer "Bottom Layer-No Net" (hatched 90Degree grid 0.2 track 0.2, remove dead copper, pour order 1122): 84.797,73 84.797,78.203 83.8,79.2 83.7,79.3 81.8,79.3 78.4,79.3 76.8,77.7 75.397,76.297 75.397,76 82.897,76 83.197,75.7 84.797,74.1 84.797,73.7
U on BottomLayer "Bottom Layer-No Net" (hatched 90Degree grid 0.2 track 0.2, remove dead copper, pour order 1121): 84.8,74.797 84.8,76.2 84.1,76.9 73.3,76.9 72.7,76.3 72.7,75.197 73.197,74.7 79.597,74.7 80.597,75.7 81.7,75.7 82.197,75.7 83.397,74.5
U on BottomLayer "Bottom Layer-No Net" (hatched 90Degree grid 0.2 track 0.2, remove dead copper, pour order 1120): 78.9,75.9 73.2,75.9 72.8,75.5 72.7,75.4 72.7,73.8 72.7,68.9 73.2,68.4 73.5,68.1 77.3,68.1 95.5,68.1 95.8,68.4 95.8,70.2 95.5,70.5 94.3,71.7 86,71.7 85.3,71.7 84.8,72.2 84.8,75 84.6,75.2 83.3,75.2 83.2,75.1 83.2,72.5 82.5,71.8 82.2,71.5 81.2,71.5 80.8,71.5 79.9,72.4 79.7,72.6 79.7,73.8 79.7,75.5 79.3,75.9
I_SHUNT on BottomLayer "Bottom Layer-No Net" (hatched 90Degree grid 0.2 track 0.5, remove dead copper, pour order 1119): 29.993,57.5 29.993,52.407 30.7,51.7 91.6,51.7 92,52.1 92,59.7 90.7,61 31.1,61 30,59.9
GND on BottomLayer "Bottom Layer-No Net" (hatched 90Degree grid 0.2 track 0.25, remove dead copper, pour order 1118): 12,86.1 9.5,83.6 9.5,35.6 5.59,31.69 1.09,31.69 0.8,31.4 0.8,23.9 1.5,23.2 8.6,23.2 17.7,32.3 17.7,39 20.9,42.2 33.6,42.2 37.9,46.5 37.9,49.9 37.2,50.6 30.4,50.6 14.4,66.6 14.4,83.1 15.762,84.462 74.462,84.462 74.8,84.8 74.8,85.8 74.5,86.1
+80V on BottomLayer "Bottom Layer-No Net" (hatched 90Degree grid 0.2 track 0.25, remove dead copper, pour order 1117): 74.4,83.5 16.1,83.5 15.4,82.8 15.4,77.7 17,76.1 18.1,75 18.1,73.6 18.1,72.7 18.4,72.4 19.5,72.4 19.8,72.7 19.8,74.9 21.3,76.4 25.1,80.2 32.6,80.2 74.5,80.2 74.8,80.5 74.8,83.1 74.4,83.5
+80V on BottomLayer "Bottom Layer-No Net" (hatched 90Degree grid 0.2 track 0.25, remove dead copper, pour order 1115): 7.5,76.997 2.6,76.997 1,75.397 1,33.6 1.2,33.4 1.5,33.1 4.9,33.1 5.5,33.1 7.8,35.4 8.2,35.8 8.2,54.1 8.2,76.297 7.5,76.997
V on BottomLayer "Top Layer-No Net" (hatched 90Degree grid 0.2 track 0.2, remove dead copper, pour order 1061): 58.4,76.9 59.3,76 59.3,75.4 59.3,72.2 65,66.5 65.6,65.9 58.397,65.9 58.1,66.197 57.8,66.497 57.8,76.397 57.897,76.397 58.4,76.9

## Keep-outs
KeepOutLayer:
  circle w0.1: c3,84 r1.6
  circle w0.1: c102,84 r1.6
  circle w0.1: c3,3 r1.6
  circle w0.1: c102,3 r1.6
  lines w0.1: 0,2 ccw(c2,2) 2,0 103,0 ccw(c103,2) 105,2 105,85 ccw(c103,85) 103,87 2,87 ccw(c2,85) 0,85 0,2

## Silkscreen, mask and mechanical layers (free items; w line width, h text height)
TopOverlay:
  drawing of 699 lines, arcs and shapes, not listed
  text "2019-10-28" at 62.5,78 h1.6
  text "FU6861Q_中压DEMO_V3.0" at 27.5,77.8 h3
  text "U" at 76.7,64.8 h2
  text "V" at 50.6,64.7 h2
  text "W" at 24.8,63.9 h2
  text "GND" at 98.035,49.4 h0.6 r90
  text "GND" at 98.035,46.8 h0.6 r90
  text "1" at 76.2,46.2 h1.3
  text "2" at 78.6,46.2 h1.3
  text "1" at 57.7,46.1 h1.3
  text "2" at 60.1,46.1 h1.3
  text "3" at 62.5,46.1 h1.3
  text "3" at 80.8,46.1 h1.3
  text "1" at 39.7,45.8 h1.3
  text "2" at 42.1,45.8 h1.3
  text "3" at 45.3,45.8 h1.3
  text "2" at 73.9,41 h1.3
  text "1" at 71.8,40.9 h1.3
  text "3" at 76.4,40.9 h1.3
  text "BLDC:短接J9.J10.J11的1，2脚。" at 10.197,38.1 h2
  text "FOC:短接J9.J10.J11的2，3脚。" at 10.2,36.1 h2
  text "VDD5" at 79.1,33.797 h0.6
  text "FK" at 81.6,33.797 h0.6
  text "FD" at 83.5,33.797 h0.6
  text "GND" at 85.7,33.797 h0.6
  text "DC+" at 9.6,32.7 h2 r90
  text "外部LDO短接J4的1,2脚。" at 80.5,32.4 h1.8
  text "GND" at 36.6,31.1 h0.6
  text "GND" at 38.9,31.1 h0.6
  text "内部LDO短接J4的2,3脚。" at 80.7,29.9 h1.8
  text "GND" at 44.9,29.2 h0.6 r90
  text "DC-" at 9.7,25.7 h2 r90
  text "外部LDO时短接J8。" at 31.1,15.6 h1.8
  text "GND" at 36.3,0.6 h1
  text "HW" at 39.6,0.6 h1
  text "HV" at 42.1,0.6 h1
  text "HU" at 44.6,0.61 h1
  text "5V" at 47.1,0.6 h1
BottomSolder:
  rectangle: 30.1,52.3 39.4,61.3
  rectangle: 30.5,52.3 92.1,59.4